# Altium PCB LC - Agregation Boards (RJ-R45).PcbDoc
Units mm, origin at the board's own origin, x right, y up, seen from the top; angles counter-clockwise.
Board outline 80 x 30 mm, 2 copper layers (Top Layer, Bottom Layer); 6 components, 17 nets, 50 pads, 6 vias.
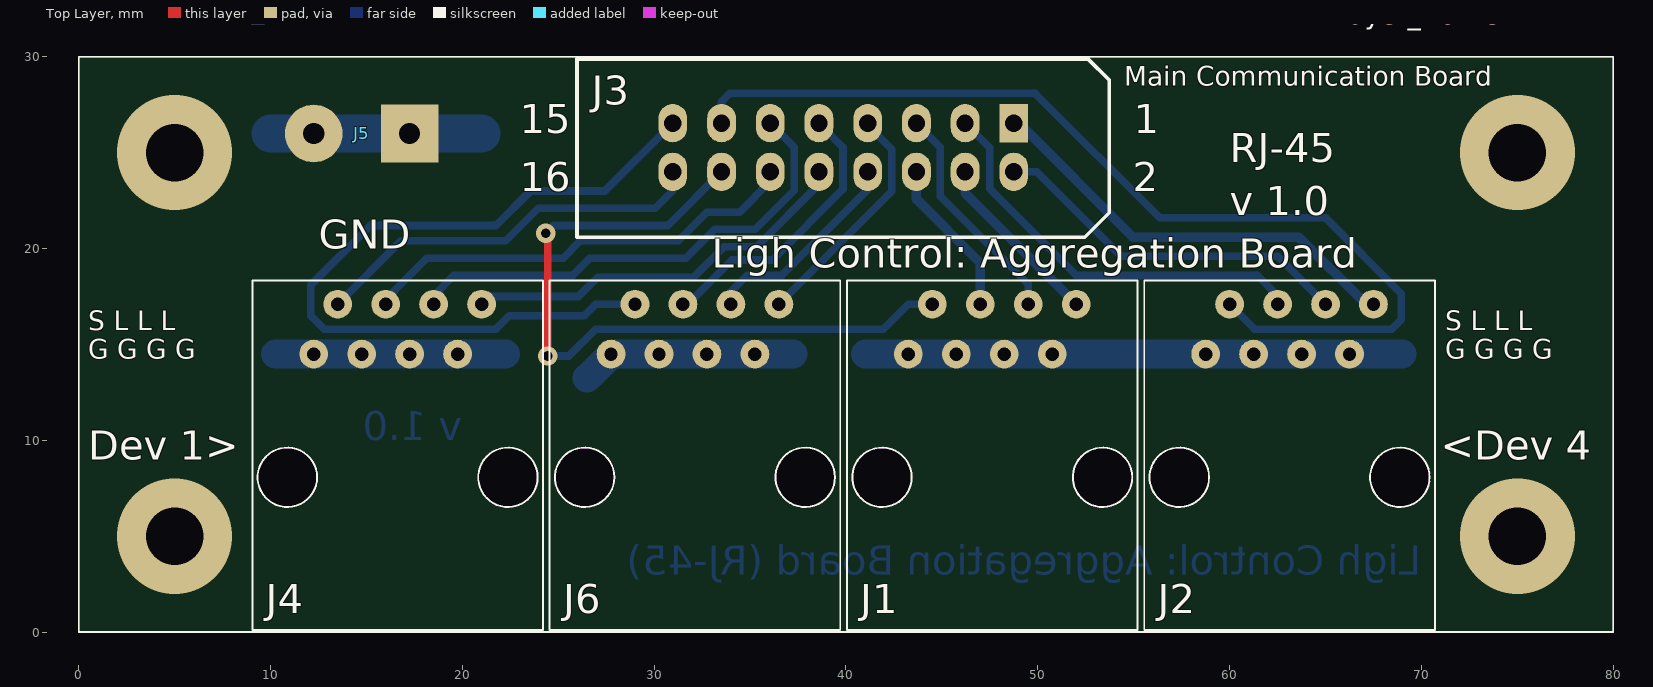
[diagram p0: Top Layer view]
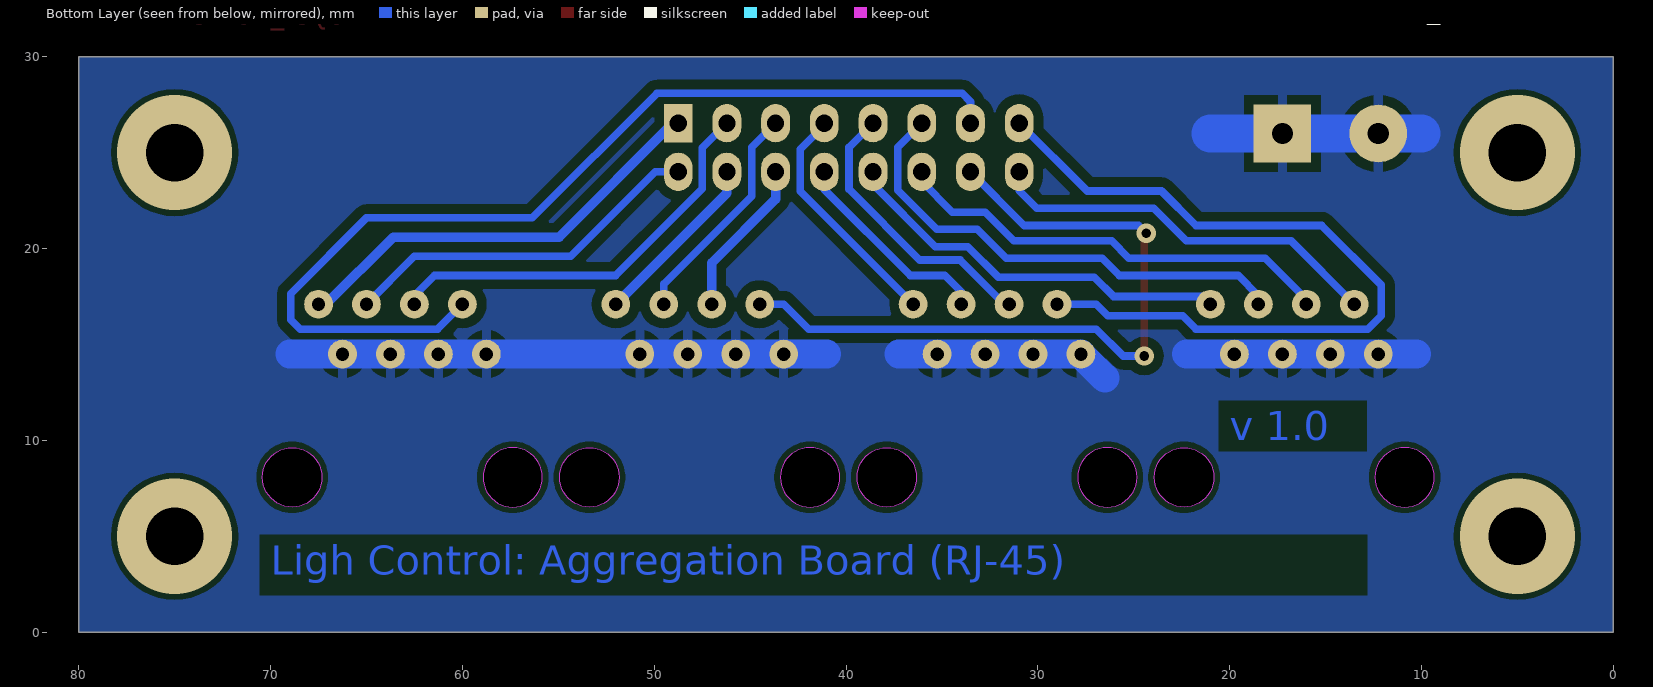
[diagram p1: Bottom Layer view, seen from below]
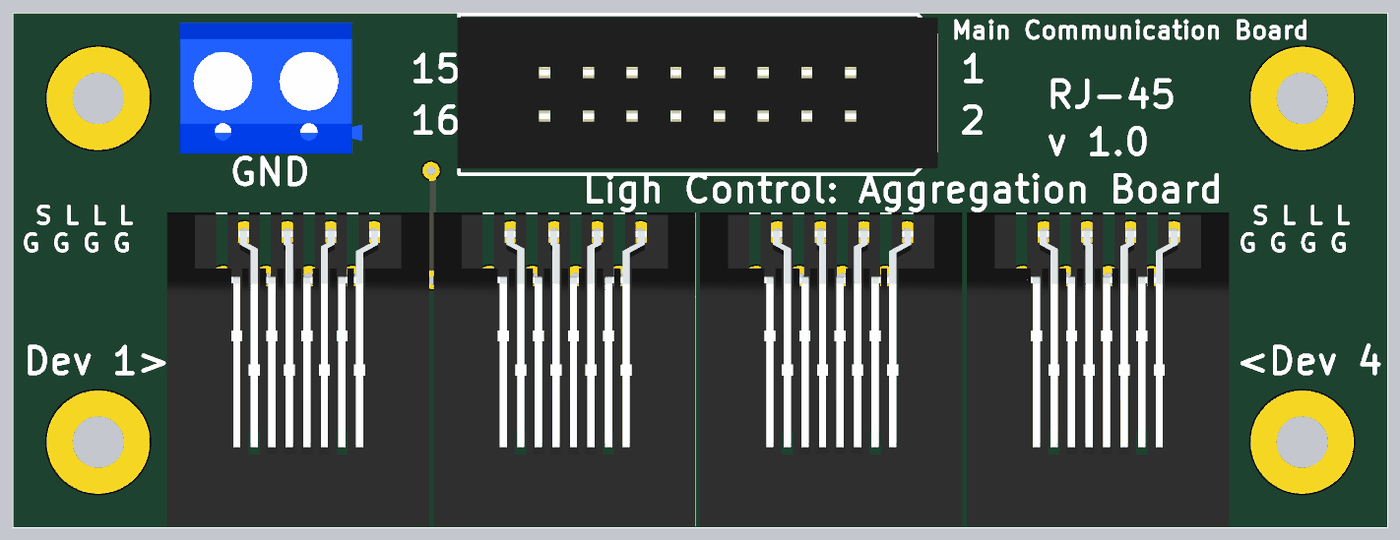
[diagram p2: 3D render of the assembled board from above, using the file's embedded part models]

## Layer stack, top to bottom
Top Solder: solder mask 0.0102, Solder Resist, Dk 3.5
Top Layer: signal copper 0.0356
Dielectric 1: dielectric 0.32, FR-4, Dk 4.8
Bottom Layer: signal copper 0.0356
Bottom Solder: solder mask 0.0102, Solder Resist, Dk 3.5

## Board outline
0,0 0,30 80,30 80,0

## Design rules (kind name [scope] priority, off if disabled: settings)
Clearance Clearance_1 [InPolygon vs (InNetClass('All Nets'))] p1: gap=0.5 ignorepadtopadclearanceinfootprint=FALSE
Clearance [All] p2: gap=0.3 ignorepadtopadclearanceinfootprint=FALSE except(0: Arc-Hole Track-Hole SMDPad-Hole THPad-Hole Via-Hole Fill-Hole Poly-Hole Region-Hole Text-Hole)
ComponentClearance [All] p1: gap=0.01 collisioncheckmode=3 verticalgap=0.2 showdistances=FALSE
Height [All] p1: minheight=0 maxheight=25 prefheight=12.7
HoleSize [All] p1: absolutevalues=TRUE maxlimit=3.2 minlimit=0.4 maxpercent=80.000 minpercent=20.000
HoleToHoleClearance [All] p1: gap=0.2 allowstackedmicrovias=TRUE
PlaneClearance [All] p1: clearance=0.5
PlaneConnect [All] p1: planeconnectstyle=Relief reliefexpansion=0.508 reliefentries=4 reliefconductorwidth=0.5 reliefairgap=0.5
PolygonConnect [All] p1: connectstyle=Relief reliefconductorwidth=0.5 reliefentries=4 polygonreliefangle="90 Angle" airgapwidth=0.5
RoutingVias [All] p1: holewidth=0.7 width=1.5 viastyle="Through Hole" minholewidth=0.4 minwidth=0.4 maxholewidth=3.2 maxwidth=7
SilkToSilkClearance [All] p1: silktosilkclearance=0.05
SilkToSolderMaskClearance [IsPad] p1: minsilkscreentomaskgap=0.2 clearancetoexposedcopper=TRUE
SolderMaskExpansion [All] p1: expansion=0.1
Width [All] p1: maxlimit=3 minlimit=0.2 preferedwidth=0.5
22 further rules are at their usual default settings.

## Components (designator, comment, footprint, x,y, rotation, side; value= is the part's Value field where it differs from the comment)
J1 "RJ-45 (8P8C)" RJ-45 41.875,8.075 r0 top
J2 "RJ-45 (8P8C)" RJ-45 57.375,8.075 r0 top
J3 "Connector" "LINE 2.54 x 16D (2 x 8) BH" 48.75,26.54 r270 top
J4 "RJ-45 (8P8C)" RJ-45 10.875,8.075 r0 top
J5 "Connector" "DG301 5mm 2p" 17.25,26 r180 top
J6 "RJ-45 (8P8C)" RJ-45 26.375,8.075 r0 top

## Footprints (in the part's own frame and the unit in brackets; to place one, negate y for a bottom-side part, rotate by r counter-clockwise, add the part's x,y. Pads: shape width x height; smd on the part's side, far side on the other; paste and mask are expansions set on the pad)
"DG301 5mm 2p" [mm]
  rect 3x3 hole 1.1: 1(0,0)
  round 3 hole 1.1: 2(5,0)
  body extent -3.1,-3.4 7.5,4.2, height 10
"LINE 2.54 x 16D (2 x 8) BH" [mm]
  rect 2x1.5 hole 0.9: 1(0,0)
  oval 2x1.5 hole 0.9: 2(2.54,0) 3(0,-2.54) 4(2.54,-2.54) 5(0,-5.08) 6(2.54,-5.08) 7(0,-7.62) 8(2.54,-7.62) 9(0,-10.16) 10(2.54,-10.16) 11(0,-12.7) 12(2.54,-12.7) 13(0,-15.24) 14(2.54,-15.24) 15(0,-17.78) 16(2.54,-17.78)
  silkscreen extent -3.35,-22.77 5.95,4.97, body extent -3.45,-22.87 6.05,5.07, height 9
RJ-45 [mm]
  round 1.5 hole 0.7: 1(1.375,6.425) 2(2.625,9.025) 3(3.875,6.425) 4(5.125,9.025) 5(6.375,6.425) 6(7.625,9.025) 7(8.875,6.425) 8(10.125,9.025)
  Keep-Out Layer board cut-out: 0,-1.55 -0.593,-1.432 -1.096,-1.096 -1.432,-0.593 -1.55,0 -1.55,0 -1.432,0.593 -1.096,1.096 -0.593,1.432 0,1.55 0,1.55 0.593,1.432 1.096,1.096 1.432,0.593 1.55,0 1.55,0 1.432,-0.593 1.096,-1.096 0.593,-1.432 0,-1.55
  Keep-Out Layer board cut-out: 9.95,0 10.068,-0.593 10.404,-1.096 10.907,-1.432 11.5,-1.55 11.5,-1.55 12.093,-1.432 12.596,-1.096 12.932,-0.593 13.05,0 13.05,0 12.932,0.593 12.596,1.096 12.093,1.432 11.5,1.55 11.5,1.55 10.907,1.432 10.404,1.096 10.068,0.593 9.95,0
  silkscreen extent -1.83,-7.95 13.33,10.25, body extent -1.88,-7.99 13.36,10.29, height 12.7

## Part data
J1 J2 J4 J6: "Ethernet"
J3: library part "PLD-16 (2 x 8)", "Vert, Dbl line, Male"
J5: library part DG301-5.0-2P12, "DG301 series"

## Via types
v1: diameter 6, hole 3, Top Layer to Bottom Layer, 4 vias
v2: diameter 1, hole 0.5, Top Layer to Bottom Layer, 2 vias

## Nets (pads, with @x,y where several pads share a name; then routed paths per layer and width w, separated by ;. In a path a pad name is that pad's centre, name@x,y a point inside that pad or via, vN(x,y) a via of type N, cw(c..) or ccw(c..) an arc to the next point about the centre after c; other vN are vias at no path point)
"Data 1": J2.2 J3.13 | length 52.1
  Bottom Layer w0.4: J3.13 33.51,27.66 33.95,28.1 49.85,28.1 56.35,21.6 65,21.6 68.95,17.65 68.95,16.3 68.45,15.8 61.3,15.8 J2.2
"Data 2": J1.2 J3.14 | length 38.1
  Top Layer w0.4: v2(24.35,20.8) 24.45,20.7 v2(24.45,14.4)
  Bottom Layer w0.4: v2(24.35,20.8) 24.75,21.2 30.71,21.2 J3.14 ; v2(24.45,14.4) 25.55,14.4 26.95,15.8 41.95,15.8 43.25,17.1 J1.2
"Data 3": J3.15 J6.2 | length 41.7
  Bottom Layer w0.4: J6.2 26.95,17.1 26.35,16.5 22.45,16.5 21.75,15.8 12.8,15.8 12.1,16.5 12.1,18.1 15.2,21.2 21.75,21.2 23.55,23 27.43,23 J3.15
"Data 4": J3.16 J4.2 | length 20.9
  Bottom Layer w0.4: J4.2 16.8,20.4 22.25,20.4 23.95,22.1 30.05,22.1 30.97,23.02 J3.16
"EC 1": J2.8 J3.1 | length 22.7
  Bottom Layer w0.5: J3.1 49.01,26.54 54.95,20.6 63.6,20.6 67.1,17.1 J2.8
"EC 2": J2.6 J3.2 | length 19.1
  Bottom Layer w0.4: J3.2 49.95,24 54.35,19.6 62.5,19.6 J2.6
"EC 3": J2.4 J3.3 | length 21.7
  Bottom Layer w0.4: J3.3 47.5,25.25 47.5,23.112 52.012,18.6 61.45,18.6 62.5,17.55 J2.4
"EC 4": J1.8 J3.4 | length 9.3
  Bottom Layer w0.5: J3.4 46.21,22.89 J1.8
"EC 5": J1.6 J3.5 | length 11.9
  Bottom Layer w0.4: J3.5 44.92,25.29 44.92,22.73 49.5,18.15 J1.6
"EC 6": J1.4 J3.6 | length 8.3
  Bottom Layer w0.5: J3.6 43.67,22.58 47,19.25 J1.4
"EC 7": J3.7 J6.8 | length 12.3
  Bottom Layer w0.4: J6.8 42.38,22.98 42.38,25.17 J3.7@41.13,26.42
"EC 8": J3.8 J6.6 | length 10.9
  Bottom Layer w0.4: J6.6 34,17.75 34.85,18.6 36.65,18.6 41.13,23.08 J3.8
"EC 9": J3.9 J6.4 | length 14.8
  Bottom Layer w0.4: J6.4 31.75,17.1 34.05,19.4 36.15,19.4 39.84,23.09 39.84,25.29 J3.9
"EC 10": J3.10 J4.8 | length 20.8
  Bottom Layer w0.4: J4.8 21.4,17.5 26.05,17.5 27.05,18.5 32.05,18.5 33.65,20.1 35.35,20.1 38.59,23.34 J3.10
"EC 11": J3.11 J4.6 | length 25.5
  Bottom Layer w0.4: J4.6 18.5,17.55 19.55,18.6 25.75,18.6 26.65,19.5 31.65,19.5 33.15,21 35.26,21 37.3,23.04 37.3,25.29 J3.11
"EC 12": J3.12 J4.4 | length 23.3
  Bottom Layer w0.4: J4.4 16,17.35 18.15,19.5 25.25,19.5 26.15,20.4 31.25,20.4 32.75,21.9 34.45,21.9 36.05,23.5 J3.12
GND: J1.1 J1.3 J1.5 J1.7 J2.1 J2.3 J2.5 J2.7 J4.1 J4.3 J4.5 J4.7 J5.1 J5.2 J6.1 J6.3 J6.5 J6.7 | length 62.3
  Bottom Layer w1.5: 10.25,14.5 22.25,14.5 ; 26.5,13.25 J6.1 37.25,14.5 ; 41,14.5 J1.1 J2.3 69,14.5
  Bottom Layer w2: 10,26 21,26
copper on no net:
  other v1: 5,5 75,5 5,25 75,25

## Polygon pours and split planes (outlines as drawn)
GND on Bottom Layer "Bottom Layer-No Net" (solid, pour order 0): 80,0 80,30 0,30 0,0

## Other copper
Top Layer:
  text ".Layer_Name" at 64.975,31.7 h1
Bottom Layer:
  text ".Layer_Name" at 14,32 h1
  text "v 1.0" at 20,10 h1.52
  text "Ligh Control: Aggregation Board (RJ-45)" at 70,3 h1.52

## Silkscreen, mask and mechanical layers (free items; w line width, h text height)
Top Overlay:
  the board outline again, w0.1
  text ".Layer_Name" at 64.975,31.7 h1
  text "Main Communication Board" at 54.5,28.5 h1
  text "RJ-45" at 60,24.5 h1.52
  text "v 1.0" at 60,21.75 h1.52
  text "GND" at 12.5,20 h1.52
  text "Ligh Control: Aggregation Board" at 33,19 h1.52
  text "S L L L / G G G G" at 0.5,14.25 h1
  text "S L L L / G G G G" at 71.25,14.25 h1
  text "Dev 1>" at 0.5,9 h1.52
  text "<Dev 4" at 71,9 h1.52
Bottom Overlay:
  text ".Layer_Name" at 14,32 h1
Top Solder:
  text ".Layer_Name" at 64.975,31.7 h1
Bottom Solder:
  text ".Layer_Name" at 14,32 h1
Mechanical 2:
  text "30 x 80 mm" at 0,35.25 h1
  text "Ligh Control: Aggregation Board (RJ-45)" at -0.025,33.475 h1
  text ".Pcb_File_Name_No_Path" at -0.075,31.425 h1
Mechanical 3:
  text "30 x 80 mm" at 80,35.25 h1
  text "Ligh Control: Aggregation Board (RJ-45)" at 79.975,33.475 h1
  text ".Pcb_File_Name_No_Path" at 79.925,31.425 h1

## Dimensions
0,-1 to 80,-1 on Mechanical 3
-1,30 to -1,0 on Mechanical 3
-1,30 to -1,0 on Mechanical 2
0,-1 to 80,-1 on Mechanical 2

## Text inside footprints (layer, text, board x,y; h text height)
J3: Top Overlay "16" at 23,23 h1.52; Top Overlay "15" at 23,26 h1.52; Top Overlay "2" at 54.95,23 h1.52; Top Overlay "1" at 55,26 h1.52